# Altium PCB 1.PcbDoc (part 2 of 2)
Units mil, origin at the board's own origin, x right, y up, seen from the top; angles counter-clockwise.
Board outline 9055.12 x 5905.51 mil, 2 copper layers (Top Layer, Bottom Layer); 240 components, 221 nets, 945 pads, 455 vias.
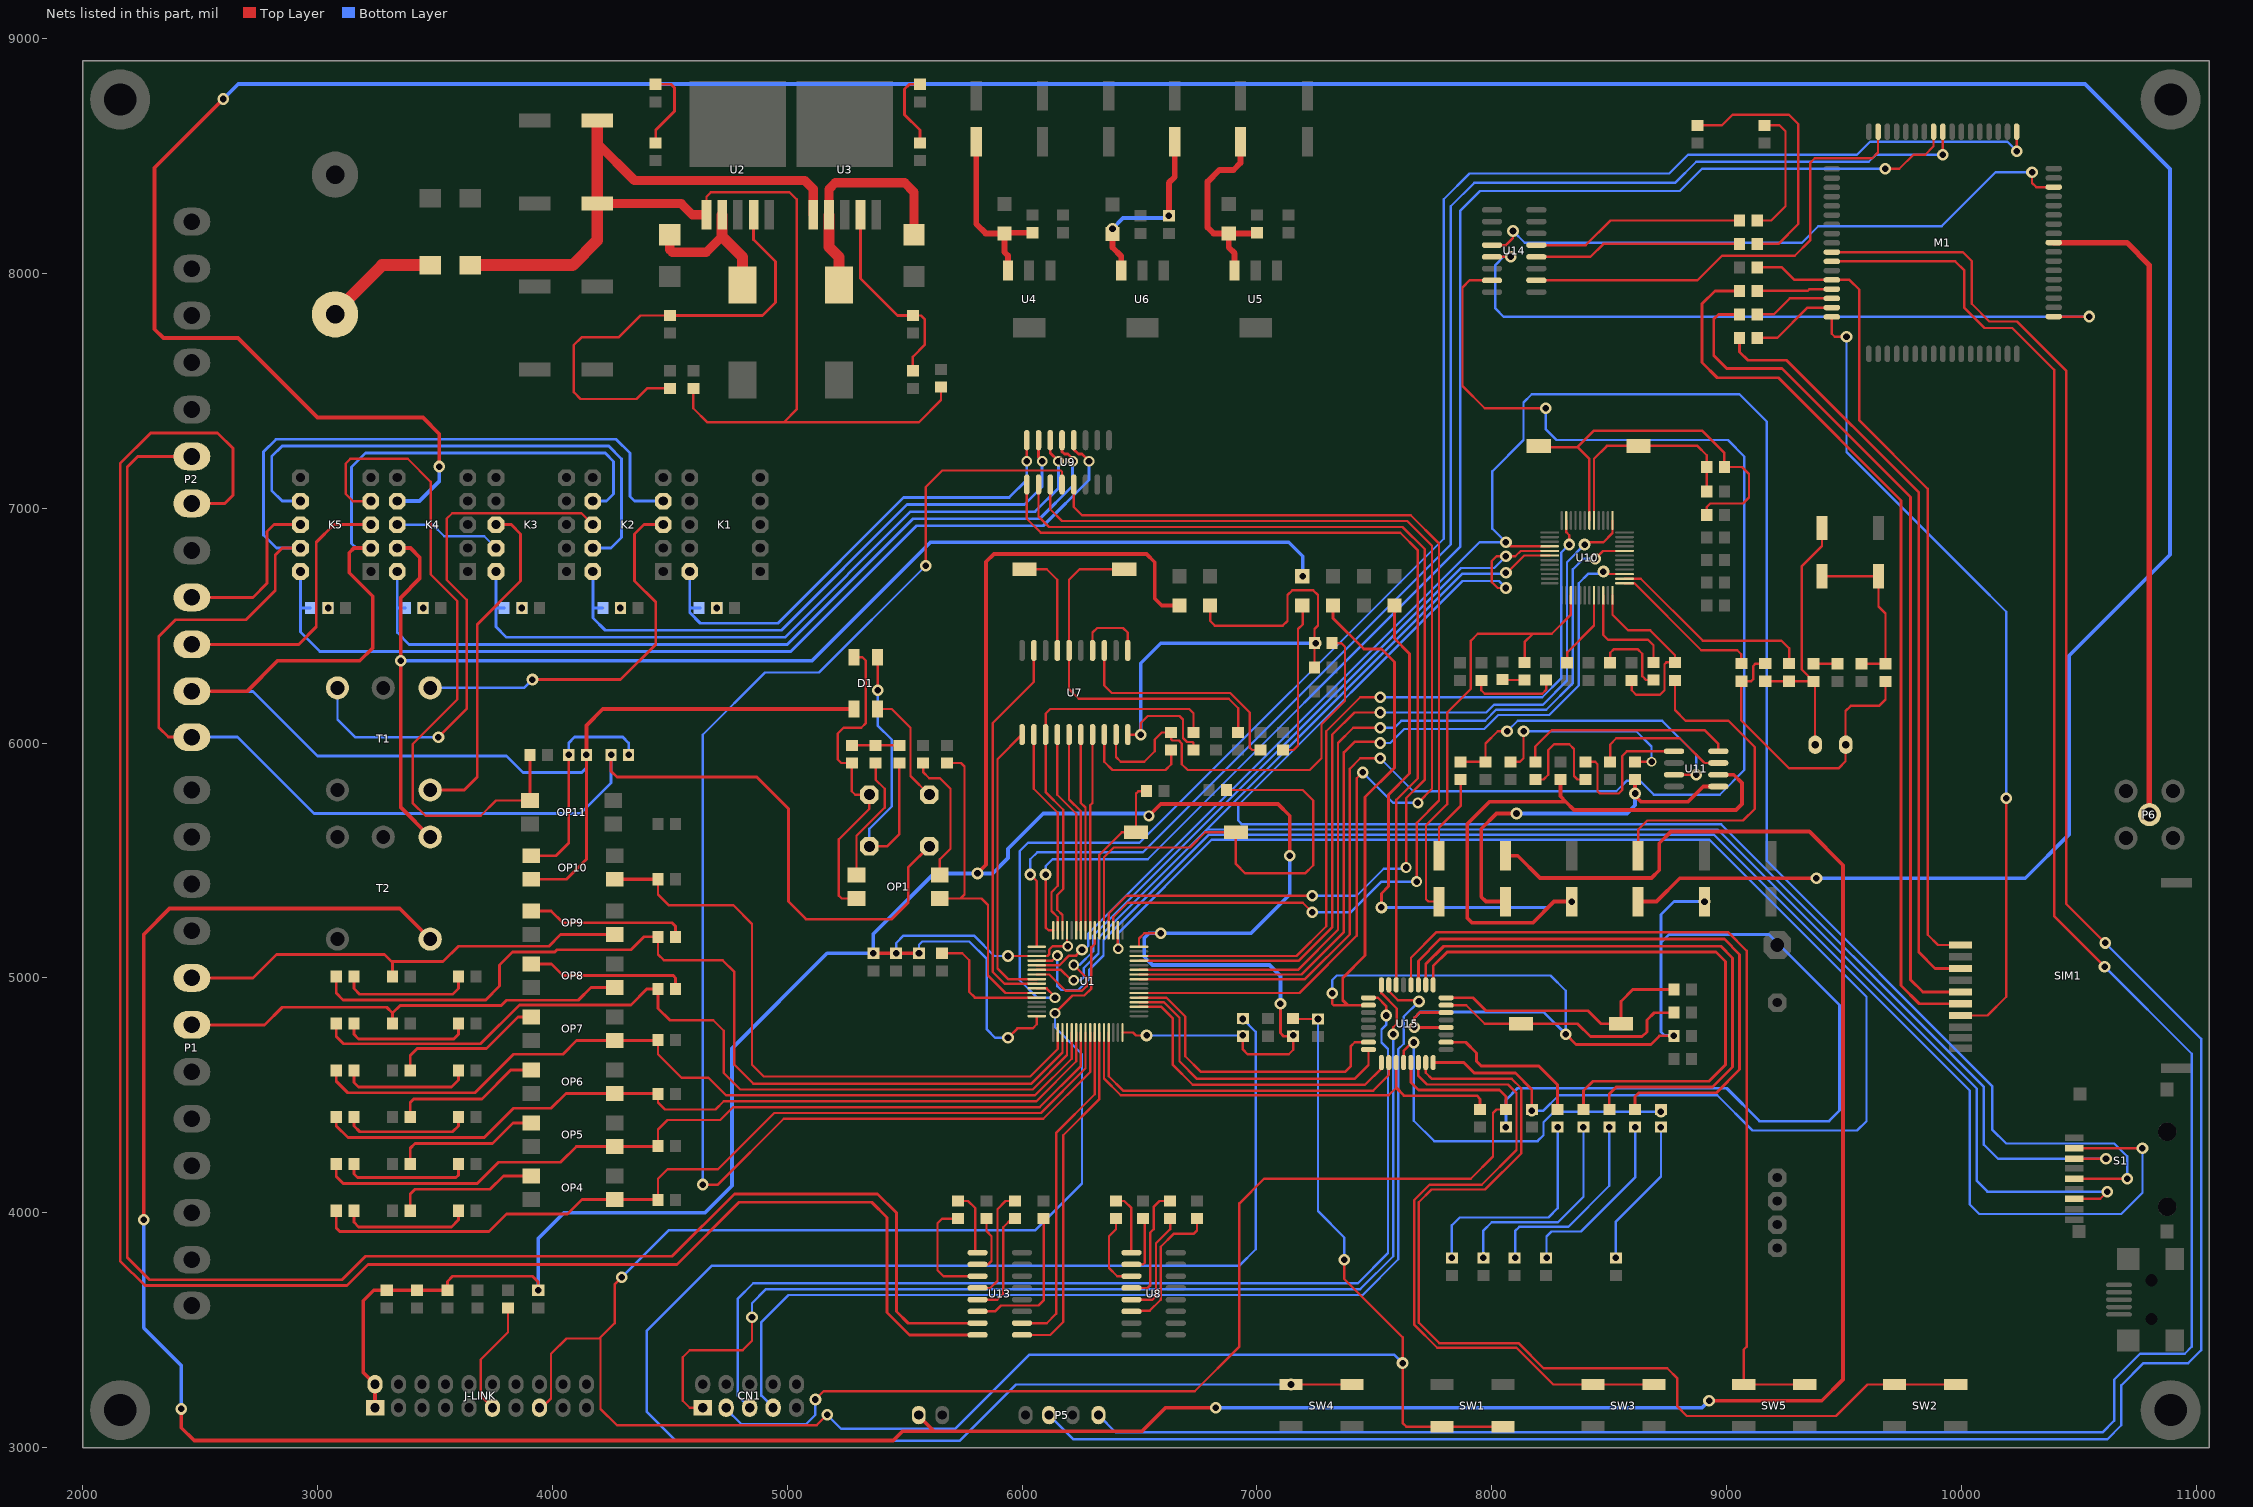
[diagram p2: the nets of this part, all layers, seen from the top]

## Via types
v1: diameter 50, hole 28, Top Layer to Bottom Layer, tented both sides, 197 vias
v2: diameter 47, hole 28, Top Layer to Bottom Layer, tented both sides, 140 vias
v3: diameter 42, hole 28, Top Layer to Bottom Layer, tented both sides, 78 vias
v4: diameter 45, hole 28, Top Layer to Bottom Layer, tented both sides, 27 vias
v5: diameter 46, hole 28, Top Layer to Bottom Layer, tented both sides, 7 vias
v6: diameter 35, hole 28, Top Layer to Bottom Layer, tented both sides, 4 vias
v7: diameter 44, hole 28, Top Layer to Bottom Layer, tented both sides, 1 vias
v8: diameter 40, hole 28, Top Layer to Bottom Layer, tented both sides, 1 vias

## Nets (pads, with @x,y where several pads share a name; then routed paths per layer and width w, separated by ;. In a path a pad name is that pad's centre, name@x,y a point inside that pad or via, vN(x,y) a via of type N, cw(c..) or ccw(c..) an arc to the next point about the centre after c; other vN are vias at no path point) (continued)
LEARN: SW3.1 U15.30 | length 2928.1
  Top Layer w10: U15.30@7687.24,4639.65 7687.24,4582.76 7723.81,4546.19 8068.81,4546.19 8105,4510 8105,4267 7957,4119 7735,4119 7669,4053 7669,3524 7768,3425 8105,3425 8261.1,3268.9 SW3.1@8430,3268.9 SW3.1@8690,3268.9
LED0: R22.1 U15.2 | length 675.3
  Top Layer w12: U15.2@7805.35,4726.26 7888.74,4726.26 7935,4680 7935,4645 7955,4625 8200,4625 8280.21,4544.79 R22.1@8280.21,4440
LED1: R21.1 U15.9 | length 2536.5
  Top Layer w12: U15.9@7750.24,4970.35 7750.24,5050.24 7810,5110 8955,5110 8995,5070 8995,4630 8925,4560 8430,4560 8390,4520 R21.1@8390,4440
LED2: R18.1 U15.10 | length 2549.6
  Top Layer w12: U15.10@7718.74,4970.35 7718.74,5058.74 7795,5135 8975,5135 9025,5085 9025,4620 8940,4535 8530,4535 8500,4505 R18.1@8500,4440
LED3: R20.1 U15.11 | length 2572.6
  Top Layer w12: U15.11@7687.24,4970.35 7687.24,5072.24 7780,5165 8990,5165 9055,5100 9055,4610 8956.19,4511.19 8626.19,4511.19 8610,4495 R20.1@8610,4440
LED-NETLIGHT: R65.2 U14.12 | length 888.3
  Top Layer w10: U14.12@8189.49,8070 8420,8070 8475,8125 R65.2@9055,8125
LED-STATUS: R64.2 U14.13 | length 909
  Top Layer w10: U14.13@8189.49,8120 8400,8120 8505,8225 R64.2@9055,8225
LED_STATUS: R74.1 U15.28 | length 1613.1
  Top Layer w10: U15.28@7624.25,4639.65 7624.25,4689.25 v1@7660,4725
  Top Layer w12: v1@7660,4725 v1(7667.81,4725)
  Bottom Layer w10: v1(7667.81,4725) 7667.81,4392.19 7755,4305 8195,4305 8220,4330 8220,4385 8265,4430 v1(8720,4430)
LINE_RECORD: C36.1 K4.9 | length 16342.3
  Top Layer w16: v1(2599,8742) 2306,8449 2306,7762 2344,7724 2662,7724 3000,7386 3449,7386 3518,7317 v1(3518,7177) ; C36.1@8622.8,5325 8701,5325 8800,5424 v1(9382,5424)
  Bottom Layer w16: v1(2599,8742) 2663,8806 10525,8806 10887,8444 10887,6802 10457,6372 10457,5610 10271,5424 v1(9382,5424) ; K4.9@3340,7030 3434,7030 3518,7114 v1(3518,7177)
LM-5V: C48.1 C50.1 L7.1 U11.6 | length 4594.3
  Top Layer w12: v1@7530,5322.38 7530,5360 7560,5390 7560,5780 7650,5870 7650,6380 7585,6445 L7.1@7585,6585
  Top Layer w16: C50.1@8292.01,5845 8292.01,5772.99 8315,5750 ; v1(8340.2,5325) 8265,5325 8175,5235 7915,5235 7895,5255 7895,5655 7990,5750 8315,5750 ; U11.6@8964.49,5865 9030,5865 9065,5830 9065,5740 9040,5715 8350,5715 8315,5750
  Bottom Layer w12: v1(7530,5300) 8240,5300 8265,5325 v1(8340.2,5325)
M8-5V: C59.1 C60.1 L8.1 R35.2 U15.4 U15.6 U15.18 | length 8727.8
  Top Layer w10: v1(7320,4935) 7320,4890 7326.26,4883.74 7386.26,4883.74
  Top Layer w12: L8.1@7323.57,6585 7323.57,6531.43 7455,6400 7530,6400 7585,6345 7585,5895 7460,5770 7460,5095 7365,5000 7365,4905 7386.26,4883.74 U15.18@7474.65,4883.74 ; U15.4@7805.35,4789.25 7670.75,4789.25 v1(7670,4790) 7670,4830 7692.24,4852.24 U15.6@7805.35,4852.24 ; v1(8315,4760) 8358,4717 8677,4717 8713.33,4753.33 v1(8775,4753.33)
  Bottom Layer w10: v1(7320,4935) 7320,4990 7340,5010 8250,5010 8315,4945 v1(8315,4760)
  Bottom Layer w12: v1(7670,4790) 7670,4830 7695,4855 8220,4855 v1(8315,4760) ; v2(8060,4365) 8060,4480 8110,4530 9000,4530 9140,4390 9435,4390 9480,4435 9480,4885 9180,5185 8755,5185 8720,5150 ; v1@8780,4755 8735,4755 8720,4770 8720,5150 ; v1@8904,5325 8775,5325 8720,5270 8720,5150
  other v1: 8905.4,5325
M8_MISO: CN1.1 U15.16 | length 4772.9
  Top Layer w10: CN1.1@4640,3170 4585,3170 4555,3200 4555,3385 4585,3415 4810,3415 4850,3455 v1(4850,3555) ; U15.16@7529.76,4970.35 7529.76,4935.24 7595,4870 7595,4805 7580,4790 v1(7580,4760)
  Bottom Layer w10: v1(4850,3555) 4850,3615 4910,3675 7440,3675 7580,3815 v1(7580,4760) v1@7580,4765
M8_MOSI: CN1.7 U15.15 | length 4516.3
  Top Layer w10: U15.15@7561.26,4970.35 7561.26,4943.67 7599.93,4905 7685,4905 v1(7690,4900)
  Bottom Layer w10: CN1.7@4940,3170 4940,3171.42 4890,3221.42 4890,3535 5005,3650 7450,3650 7601.81,3801.81 7601.81,4696.81 7625,4720 7625,4835 v1(7690,4900)
M8_Q0: U1.53 U15.23 | length 1308.7
  Top Layer w10: U1.53@6497.52,4916.1 6613.9,4916.1 6695,4835 6695,4666.81 6761.81,4600 7375,4600 7400,4625 7400,4710 7416.26,4726.26 U15.23@7474.65,4726.26
M8_Q1: U1.52 U15.24 | length 1310.5
  Top Layer w10: U1.52@6497.52,4896.42 6603.58,4896.42 6670,4830 6670,4645 6745,4570 7415,4570 7474.65,4629.65 U15.24@7474.65,4694.76
M8_Q2: U1.51 U15.25 | length 1339.5
  Top Layer w10: U1.51@6497.52,4876.73 6593.27,4876.73 6640.91,4829.09 6640.91,4630.91 6726.81,4545 7460,4545 7529.76,4614.76 U15.25@7529.76,4639.65
M8_Q3: U1.45 U15.26 | length 1485
  Top Layer w10: U1.45@6368.58,4767.48 6368.58,4581.42 6430,4520 7495,4520 7561.26,4586.26 U15.26@7561.26,4639.65
M8_RELAY_POWER: U9.1 U15.14 | length 3754.3
  Top Layer w10: U9.1@6020,7100.51 6020,6955 6080,6895 7610,6895 7685,6820 7685,5850 7592.76,5757.76 U15.14@7592.76,4970.35
M8_RESET: CN1.3 R35.1 U15.29 | length 4979.9
  Top Layer w10: v1(5120,3205) 5155,3240 6735,3240 6925,3430 6925,4040 7030,4145 7910,4145 8005,4240 8005,4425 8020,4440 R35.1@8060,4440
  Top Layer w12: U15.29@7655.75,4639.65 7655.75,4554.25 7687.62,4522.38 8032.62,4522.38 8060,4495 R35.1@8060,4440
  Bottom Layer w10: CN1.3@4740,3170 4740,3165 4805,3100 5080,3100 5120,3140 v1(5120,3205)
M8_SCK: CN1.5 U15.17 | length 4495.6
  Top Layer w10: U15.17@7474.65,4915.24 7514.76,4915.24 7550,4880 v1(7550,4840)
  Bottom Layer w10: CN1.5@4840,3170 4790,3220 4790,3635 4855,3700 7430,3700 7558.19,3828.19 7558.19,4696.81 7530,4725 7530,4780 7550,4800 v1(7550,4840)
M8_TO_STM32: R6.1 U1.44 U15.27 | length 2012.3
  Top Layer w10: U1.44@6348.9,4767.48 6348.9,4571.1 6420,4500 7560.51,4500 7592.76,4532.24
  Top Layer w12: U15.27@7592.76,4639.65 7592.76,4532.24 7626.43,4498.57 7936.43,4498.57 7950,4485 R6.1@7950,4440
MCU-3.3V: C22.1 C23.1 C24.1 J-LINK.1 J-LINK.2 L6.1 R19.2 R28.2 R31.2 R32.2 R33.2 R75.2 U1.13 U1.19 U1.32 U1.48 U1.64 | length 13440.5
  Top Layer w10: v1@5940,4755 v1(5940,4745) 5980,4785 6045,4785 6062.48,4802.48 U1.32@6062.48,4837.36 ; v1(5940,5093.27) U1.19@6062.48,5093.27 6108.27,5093.27 6115,5100 6115,5120 6130,5135 v4(6195,5135) 6191.42,5138.58 U1.13@6191.42,5202.52 ; U1.48@6427.95,4767.48 6472.52,4767.48 6485,4755 v1(6530,4755) v1@6517.52,4767.48 ; U1.64@6497.52,5132.64 6497.52,5167.52 6520,5190 v1(6590,5190) ; R19.2@6940,4751.61 6940,4695 6960,4675 7135,4675 7154.34,4694.34 R75.2@7154.34,4751.61
  Top Layer w12: R31.2@3553,3670 3553,3708 3575,3730 3915,3730 3940,3705 v1(3940,3670) ; v1(7100,4890) 7100,4765 7113.39,4751.61 R75.2@7154.34,4751.61
  Top Layer w16: J-LINK.1@3245,3170 J-LINK.2@3245,3270 3195,3320 3195,3625 3240,3670 R33.2@3295,3670 R32.2@3424,3670 R31.2@3553,3670 ; v2(5366.49,5105) v2(5463.82,5105) v2(5561.16,5105) ; v1(5810,5445) 5846.71,5481.71 5846.71,6771.71 5880,6805 6530,6805 6565,6770 6565,6615 6595,6585 L6.1@6670,6585 ; v2(6540,5690) 6590,5740 7090,5740 7140,5690 v1(7140,5520)
  Bottom Layer w10: v2(5463.82,5105) 5463.82,5148.82 5495,5180 5795,5180 5881.73,5093.27 v1(5940,5093.27) ; v2(5561.16,5105) 5561.16,5141.16 5575,5155 5775,5155 5850,5080 5850,4780 5885,4745 v1(5940,4745) ; v1(6530,4755) v2(6940,4755)
  Bottom Layer w16: v1(3940,3670) 3940,3890 4050,4000 4650,4000 4765,4115 4765,4700 5170,5105 v2(5366.49,5105) 5366.49,5186.49 5625,5445 v1(5810,5445) 5875,5445 5940,5510 5940,5550 6090,5700 6530,5700 v2(6540,5690) ; v1(7100,4890) 7100,5008.24 7053.24,5055 6555,5055 6520,5090 6520,5170 6540,5190 v1(6590,5190) 6975,5190 7140,5355 v1(7140,5520)
  other v2: 7155,4755
MCU-SIM-RESET: U1.57 U14.7 | length 6805.7
  Top Layer w10: U1.57@6497.52,4994.84 7204.84,4994.84 7395,5185 7395,5890 7440,5935 v1(7525,5935) v1@7525,5940.87 ; U14.7@8000.51,7970 7905,7970 7875,7940 7875,7520 7970,7425 v1(8230,7425)
  Bottom Layer w10: v1@7525,5940 v1(7525,5935) 7665,5795 8530,5795 8575,5840 8630,5840 8690,5780 8970,5780 9075,5885 9075,7220 9005,7290 8275,7290 8230,7335 v1(8230,7425)
MCU_IN1: D18.1 OP7.3 R43.1 U1.37 | length 3597
  Top Layer w10: R43.1@4450,4735 4450,4675 4550,4575 4665,4575 4740,4500 6055,4500 6211.1,4656.1 U1.37@6211.1,4767.48
  Top Layer w12: D18.1@3080,4606.43 3080,4560 3128.81,4511.19 3671.19,4511.19 3835,4675 4045,4675 4103.57,4733.57 OP7.3@4265,4733.57 R43.1@4448.57,4733.57
MCU_IN2: D20.1 OP6.3 R42.1 U1.38 | length 3541.3
  Top Layer w10: R42.1@4450,4506.43 4450,4470 4480,4440 4695,4440 4730,4475 6060.85,4475 6230.79,4644.94 U1.38@6230.79,4767.48
  Top Layer w12: D20.1@3080,4407.14 3080,4370 3130,4320 3710,4320 3835,4445 3995,4445 4057.86,4507.86 OP6.3@4265,4507.86 R42.1@4448.57,4507.86
MCU_IN3: D21.1 OP5.3 R41.1 U1.39 | length 3624.9
  Top Layer w10: R41.1@4450,4283.57 4450,4355 4490,4395 4715,4395 4770,4450 6075,4450 6250.47,4625.47 U1.39@6250.47,4767.48
  Top Layer w12: D21.1@3080,4207.86 3080,4155 3110,4125 3680,4125 3770,4215 4035,4215 4102.14,4282.14 OP5.3@4265,4282.14 R41.1@4448.57,4282.14
MCU_IN4: D22.1 OP4.3 R40.1 U1.40 | length 3762.1
  Top Layer w10: R40.1@4450,4055 4450,4145 4490,4185 4705,4185 4945,4425 6080,4425 6270.16,4615.16 U1.40@6270.16,4767.48
  Top Layer w12: D22.1@3080,4008.57 3080,3935 3095,3920 3730,3920 3805,3995 4065,3995 4126.43,4056.43 OP4.3@4265,4056.43 R40.1@4448.57,4056.43
MCU_OUT_Q1: D17.1 R57.2 U1.35 | length 4012.2
  Top Layer w10: R57.2@4450,5175 4450,5100 4475,5075 4725,5075 4775,5025 4775,4630 4855,4550 6040,4550 6171.73,4681.73 U1.35@6171.73,4767.48
  Top Layer w12: D17.1@3080,5005 3080,4935 3108.81,4906.19 3716.19,4906.19 3775,4965 3775,5055 3830,5110 4010,5110 4020,5120 4335,5120 4390,5175 R57.2@4450,5175
MCU_OUT_Q2: D19.1 R56.2 U1.36 | length 3762.9
  Top Layer w10: 4685,4820 4730,4775 4730,4595 4800,4525 6045,4525 6191.42,4671.42 U1.36@6191.42,4767.48
  Top Layer w12: D19.1@3080,4805.71 3080,4750 3110,4720 3695,4720 3860,4885 4335,4885 4402.14,4952.14 R56.2@4450,4952.14 4450,4870 4500,4820 4685,4820
MISO: S1.7 U1.22 U10.30 | length 7865.1
  Top Layer w10: U1.22@6062.48,5034.21 6165.79,5034.21 6210,4990 v4(6220,4990) ; v1@8065,6725 8138.11,6798.11 U10.30@8246.1,6798.11 ; S1.7@10480,4060 10590,4060 v1(10620,4090)
  Bottom Layer w10: v4(6220,4990) 6250,4990 6261.81,5001.81 6261.81,5040.97 6325,5104.15 6325,5170.85 7875.53,6721.38 8056.38,6721.38 v1(8060,6725) ; 6785,5630 6786.81,5631.81 8961.47,5631.81 10065,4528.28 10065,4135 10110,4090 v1(10620,4090)
MOSI: S1.2 U1.23 U10.29 | length 9574.4
  Top Layer w10: U1.23@6062.48,5014.53 6115.47,5014.53 6185,4945 6255,4945 6275,4965 6275,5000 v4(6220,5055) v4@6220,5060 ; v1(8060,6660) 8025,6660 8000,6685 8000,6775 8020,6795 v1(8060,6795) 8100,6795 8122.8,6817.8 U10.29@8246.1,6817.8 ; S1.2@10480,4230 v1(10615,4230)
  Bottom Layer w10: v4(6220,5055) 6245,5055 6303.19,5113.19 6303.19,5179.88 7868.31,6745 8010,6745 v1(8060,6795) ; v1(8060,6660) 8030,6690 7875,6690 6920,5735 6920,5670 6936.38,5653.62 8976.38,5653.62 10095,4535 10095,4290 10155,4230 v1(10615,4230)
MT-5V: C25.2 C26.1 L10.1 R24.1 U7.20 | length 2533.2
  Top Layer w10: U7.20@6450,6035.87 6504.13,6035.87 v1(6505,6035) 6505,6085 6535,6115 6670,6115 6685,6100 6685,6021.38 6701.81,6004.57 6725,6004.57 6730,5999.57 R24.1@6730,5970 ; L10.1@6800.71,6585 6800.71,6519.29 6820,6500 7110,6500 7130,6520 7130,6630 7150,6650 7240,6650 7260,6630 7260,6500 7245,6485 C26.1@7245,6425 C25.2@7245,6322.3
  Bottom Layer w16: v1(6505,6035) 6505,6340 6590,6425 v1(7250,6425)
MT_D0: U1.11 U7.14 | length 866.8
  Top Layer w10: U7.14@6150,6035.87 6150,5780 6230.79,5699.21 U1.11@6230.79,5202.52
MT_D1: U1.10 U7.15 | length 854.3
  Top Layer w10: U7.15@6200,6035.87 6200,5760 6250.47,5709.53 U1.10@6250.47,5202.52
MT_D2: U1.9 U7.16 | length 841.7
  Top Layer w10: U7.16@6250,6035.87 6250,5745 6270.16,5724.84 U1.9@6270.16,5202.52
MT_D3: U1.8 U7.17 | length 837.3
  Top Layer w10: U1.8@6290,5202.68 6290,5735 6300,5745 U7.17@6300,6035.87
MT_IRQ: R24.2 U1.14 U7.13 | length 1700.3
  Top Layer w10: U1.14@6171.73,5202.52 6171.73,5268.27 6150,5290 6150,5353.27 6175,5378.27 6175,5715.85 6100,5790.85 U7.13@6100,6035.87 6100,6125 6120,6145 6711.38,6145 6730,6126.38 R24.2@6730,6045
MT_RD: U1.15 U7.12 | length 909.9
  Top Layer w10: U7.12@6050,6035.87 6050,5805 6152.05,5702.95 6152.05,5392.05 6125,5365 6125,5285 6152.05,5257.95 ; U1.15@6152.05,5202.52 6152.05,5257.95 ; 6152.05,5246.12 6152.05,5257.95
MT_RS: U1.24 U7.11 | length 1225.5
  Top Layer w10: U7.11@6000,6035.87 5895,5930.87 5895,5040 5940.16,4994.84 U1.24@6062.48,4994.84
MT_RW: U1.25 U7.9 | length 1649.7
  Top Layer w10: U7.9@6050,6394.13 6050,6260 5875,6085 5875,5025 5924.84,4975.16 U1.25@6062.48,4975.16
MT_VREF: U7.1 U7.4 | length 318.3
  Top Layer w10: U7.4@6300,6394.13 6300,6470 6320,6490 6430,6490 6450,6470 U7.1@6450,6394.13
NetC1_1: C1.1 D1.2 | length 491.3
  Top Layer w10: D1.2@5385,6145 5445,6145 5525,6065 5525,5860 C1.1@5605,5780
NetC2_1: C2.1 D1.3 OP1.2 R2.2 | length 1401.2
  Top Layer w10: D1.3@5285,6365 5320,6365 5335,6350 5335,6085 5315,6065 5240,6065 5215,6040 5215,5930 5230,5915 R2.2@5275,5915 5275,5795 5290,5780 C2.1@5350,5780 5350,5720 5220,5590 5220,5350 5232.14,5337.86 OP1.2@5295,5337.86
NetC2_2: C2.2 D1.1 R1.1 | length 1320.9
  Top Layer w10: C2.2@5350,5560 5425,5560 5477.5,5612.5 R1.1@5477.5,5915 ; v1(5385,6225) D1.1@5385,6365
  Bottom Layer w10: C2.2@5350,5560 5350,5635 5445,5730 5445,6015 5385,6075 v1(5385,6225)
NetC3_1: C3.1 C4.1 C5.1 C6.1 D2.2 U2.1 U3.1 | length 5327.2
  Top Layer w10: C6.1@4600,7510 4600,7425 4660,7365 4985,7365 ; U2.1@4656.14,8248.7 4656.14,8326.14 4675,8345 5010,8345 5040,8315 5040,7420 4985,7365 ; C5.1@5655,7515 5655,7460 5560,7365 4985,7365
  Top Layer w39.37: 4191,8554 4350,8395 5075,8395 5111.14,8358.86 U3.1@5111.14,8248.7 ; C3.1@4248,8296.67 4548.33,8296.67 4596.3,8248.7 U2.1@4656.14,8248.7
  Top Layer w50: D2.2@3670,8035 4086,8035 4191,8140 C3.1@4191,8297 4191,8554 C4.1@4191,8650
NetC7_1: C7.1 C11.1 L2.2 U4.3 | length 770.2
  Top Layer w25: C11.1@5805,8560 5805,8210 5845,8170 L2.2@5925,8170 ; U4.3@5939.45,8012.05 5939.45,8075.55 5925,8090 L2.2@5925,8170 ; C7.1@6043.65,8172.4 5927.4,8172.4 L2.2@5925,8170
NetC8_1: C8.1 C10.1 L1.2 U5.3 | length 849.2
  Top Layer w25: U5.3@6904.45,8012.05 6905,8012.6 6905,8085 6880,8110 L1.2@6880,8170 ; C10.1@6930,8560 6930,8470 6900,8440 6840,8440 6790,8390 6790,8195 6815,8170 L1.2@6880,8170 ; C8.1@7001.15,8172.4 6998.75,8170 L1.2@6880,8170
NetC9_1: C9.1 C12.1 L3.2 U6.3 | length 759
  Top Layer w25: L3.2@6385,8167.6 6385,8110 6421.95,8073.05 U6.3@6421.95,8012.05 ; v4(6625,8245) 6625,8385 6650,8410 C12.1@6650,8560
  Bottom Layer w16: v1(6385,8190) 6430,8235 6615,8235 v4(6625,8245)
NetC26_2: C26.2 R23.1 U7.19 | length 1794
  Top Layer w10: U7.19@6400,6035.87 6400,5940 6420,5920 6520,5920 6565,5965 6565,6015 6595,6045 R23.1@6635,6045 6635,6015 6639.57,6010.43 6667.55,6010.43 6680,5997.99 6680,5910 6705,5885 7225,5885 7275,5935 7275,6080 7375,6180 7375,6410 7360,6425 C26.2@7320,6425
NetC27_1: C27.1 U1.5 X2.2 | length 2076.2
  Top Layer w10: U1.5@6348.9,5202.52 6348.9,5513.9 6390,5555 6715,5555 6780,5620 X2.2@6910.2,5620 6910.2,5484.8 6950,5445 7205,5445 7240,5480 7240,5755 7195,5800 C27.1@6870,5800
NetC28_1: C28.1 K4.7 T2.3 | length 5546.1
  Top Layer w16: K4.7@3340,6830 3396,6830 3435,6791 3435,6700 3355,6620 v1(3355,6350) 3355,5725 T2.3@3480,5600
  Bottom Layer w16: v1(3355,6350) 5105,6350 5610,6855 7135,6855 7195,6795 v1(7195,6710)
NetC28_2: C28.2 R27.2 | length 677.5
  Top Layer w10: R27.2@7110,5970 7155,5970 7175,5990 7175,6485 7195,6505 7195,6582.86 C28.2@7192.86,6585
NetC29_1: C29.1 U1.6 X2.1 | length 731.3
  Top Layer w10: U1.6@6329.21,5202.52 6329.21,5524.21 6425,5620 X2.1@6485,5620 6485,5785 6495,5795 C29.1@6530,5795
NetC31_1: C31.1 R36.2 U10.18 X4.2 | length 1702.8
  Top Layer w10: X4.2@8199.8,7265 8204.8,7260 8365,7260 ; U10.18@8415.39,6947.72 8415.39,7209.61 8365,7260 ; C31.1@8915,6970 8915,7005 8930,7020 9070,7020 9095,7045 9095,7145 9065,7175 R36.2@8990,7175 8990,7235 8895,7330 8435,7330 8365,7260
NetC32_1: C32.1 R36.1 U10.17 X4.1 | length 941.6
  Top Layer w10: U10.17@8435.08,6947.72 8435.08,7210.08 8490,7265 X4.1@8625,7265 8875,7265 8915,7225 R36.1@8915,7175 C32.1@8915,7070 C32.1@8915,7065
NetC33_1: C33.1 U8.2 | length 251
  Top Layer w10: U8.2@6465.24,3779.58 6514.58,3779.58 6522.24,3787.24 6522.24,3967.69 C33.1@6514.93,3975
NetC34_1: C34.1 U8.3 | length 332.3
  Top Layer w10: C34.1@6400,3975 6400,3930 6370,3900 6370,3765 6405.42,3729.58 U8.3@6465.24,3729.58
NetC34_2: C34.2 U8.1 | length 257.9
  Top Layer w10: C34.2@6400,4050 6435,4050 6465.24,4019.76 U8.1@6465.24,3839.58
NetC36_2: C36.2 R37.2 | length 1440.6
  Top Layer w10: C36.2@8622.8,5520 8622.8,5630.8 8662,5670 9070,5670 9120,5720 9120,5982 9007,6095 8825,6095 8780,6140 R37.2@8780,6268.23
NetC39_1: C39.1 R37.1 U10.48 | length 807.4
  Top Layer w10: U10.48@8513.82,6628.82 8513.82,6546.18 8580,6480 8674,6480 8780,6374 8780,6343.23 8743.23,6343.23 8735,6335 8735,6225 8715,6205 8615,6205 8595.33,6224.67 C39.1@8595.33,6266.61
NetC43_2: C43.2 U10.44 | length 334.5
  Top Layer w10: C43.2@8320.9,6341.61 8320.9,6385.9 8435.08,6500.08 U10.44@8435.08,6628.82
NetC44_1: C44.1 R50.1 | length 372.7
  Top Layer w10: C44.1@7955,6266.61 7955,6225 7970,6210 8215,6210 8231.14,6226.14 R50.1@8231.14,6268.23
NetC45_1: C45.1 R51.1 | length 343.7
  Top Layer w10: C45.1@8504.06,6341.61 8504.06,6384.06 8520,6400 8620,6400 8640,6380 8640,6285 8656.77,6268.23 R51.1@8688.52,6268.23
NetC46_1: C46.1 R52.1 | length 91.6
  Top Layer w10: C46.1@8048.09,6268.23 R52.1@8139.67,6268.23
NetC47_2: C47.2 R53.1 | length 363.2
  Top Layer w10: C47.2@7775,5520 7775,5640 7867.21,5732.21 R53.1@7867.21,5845
NetC49_1: C49.1 R58.1 | length 466.1
  Top Layer w10: R58.1@8185,5845 8220,5845 8240,5865 8240,5970 8265,5995 8330,5995 8350,5975 8350,5860 8365,5845 C49.1@8397.94,5845
NetC49_2: C49.2 U11.1 | length 660.4
  Top Layer w10: C49.2@8397.94,5920 8440,5920 8450,5910 8450,5795 8460,5785 8540,5785 8555,5800 8555,5945 8575,5965 U11.1@8775.51,5965
NetC51_2: C51.2 U11.7 | length 588.8
  Top Layer w10: C51.2@8503.87,5920 8503.87,5993.87 8530,6020 8800,6020 8905,5915 U11.7@8964.49,5915
NetC52_1: C52.1 R63.1 | length 884.1
  Top Layer w10: R63.1@8079.07,5920 8120,5920 8135,5935 v1(8135,6050) ; C52.1@8610,5920 v3(8680,5920)
  Bottom Layer w10: v1(8135,6050) 8615,6050 8680,5985 v3(8680,5920)
NetC52_2: C52.2 C53.1 U11.5 | length 1655.5
  Top Layer w10: v1@8610,5775 C52.2@8610,5845
  Top Layer w16: C53.1@8034,5325 7975,5325 7955,5345 7955,5635 8020,5700 v1(8105,5700) ; C52.2@8610,5845 v1(8610,5785) 8610,5775 8635,5750 8835,5750 8900,5815 U11.5@8964.49,5815
  Bottom Layer w16: v1(8105,5700) 8575,5700 8610,5735 v1(8610,5785)
NetC55_1: C55.1 U13.2 | length 265.2
  Top Layer w10: U13.2@5800.24,3779.58 5854.58,3779.58 5870,3795 5870,3900 5848.2,3921.8 C55.1@5848.2,3975
NetC56_1: C56.1 U13.3 | length 465.7
  Top Layer w10: C56.1@5726.6,3975 5660,3975 5640,3955 5640,3755 5665.42,3729.58 U13.3@5800.24,3729.58
NetC56_2: C56.2 U13.1 | length 276.3
  Top Layer w10: C56.2@5726.6,4050 5770,4050 5800.24,4019.76 U13.1@5800.24,3829.58
NetC57_2: C57.2 U13.6 | length 648.8
  Top Layer w10: U13.6@5810.51,3580 5885,3580 5910,3605 6070,3605 6091.6,3626.6 C57.2@6091.6,3975
NetC58_1: C58.1 U13.4 | length 501.9
  Top Layer w10: U13.4@5800.24,3679.58 5864.58,3679.58 5895,3710 5895,4015 5930,4050 C58.1@5970,4050
NetC58_2: C58.2 U13.5 | length 478.6
  Top Layer w10: U13.5@5800.24,3629.58 5894.58,3629.58 5920,3655 5920,3938 5957,3975 C58.2@5970,3975
NetC61_1: C61.1 U15.7 X5.1 | length 1096.4
  Top Layer w10: U15.7@7805.35,4883.74 7891.26,4883.74 7970,4805 X5.1@8115,4805
  Top Layer w12: X5.1@8115,4805 X5.1@8125,4805 8365,4805 8420,4750 8640,4750 8660,4770 8660,4820 8691.67,4851.67 C61.1@8775,4851.67
NetC62_1: C62.1 U15.8 X5.2 | length 1131.1
  Top Layer w12: U15.8@7805.35,4915.24 7919.76,4915.24 7975,4860 8410,4860 8465,4805 X5.2@8550.2,4805 8550.2,4900.2 8600,4950 C62.1@8775,4950
NetC65_2: C65.2 U8.6 | length 604.6
  Top Layer w10: U8.6@6465.24,3579.58 6468.66,3583 6543,3583 6590,3630 6590,3855 6645,3910 6730,3910 6745,3925 C65.2@6745,3975
NetC66_1: C66.1 U8.4 | length 505.7
  Top Layer w10: U8.4@6465.24,3679.58 6534.58,3679.58 6545,3690 6545,3915 6560,3930 6560,4025 6585,4050 C66.1@6630.07,4050
NetC66_2: C66.2 U8.5 | length 466
  Top Layer w10: U8.5@6465.24,3629.58 6554.58,3629.58 6570,3645 6570,3870 6630.07,3930.07 C66.2@6630.07,3975
NetC67_1: C67.1 C71.1 R80.1 R81.2 | length 726.7
  Top Layer w10: C67.1@9406,6710 C71.1@9646,6710 9646,6581 9676,6551 R80.1@9676,6337.61 R81.2@9574.12,6337.61
NetC67_2: C67.2 C68.2 C69.1 MIC.1 R73.1 | length 1183.5
  Top Layer w10: C68.2@9164.08,6263 C69.1@9265.76,6263 R73.1@9369.97,6263 ; MIC.1@9376,5997 9376,6256.97 R73.1@9370.36,6262.61 R73.1@9369.97,6263 ; C67.2@9406,6915 9406,6839 9319,6752 9319,6313.97 R73.1@9369.97,6263
NetC68_1: C68.1 C70.1 MIC.2 R80.2 | length 1355.8
  Top Layer w10: C68.1@9164.08,6338 9123,6338 9113,6328 9113,6272 9104,6263 C70.1@9062,6263 9062,6096 9266,5892 9476,5892 9506,5922 9506,5997 9506,6136 9528,6158 9649,6158 9676,6185 R80.2@9676,6262.61
NetC69_2: C69.2 U10.2 | length 888.8
  Top Layer w10: U10.2@8565,6699.69 8634.31,6699.69 8898.5,6435.5 9233.5,6435.5 9265.76,6403.24 C69.2@9265.76,6338
NetC70_2: C70.2 U10.1 | length 662.1
  Top Layer w10: U10.1@8565,6680 8607,6680 8892,6395 9045,6395 9062,6378 C70.2@9062,6338
NetD2_1: D2.1 F1.2 | length 497.8
  Top Layer w50: F1.2@3075,7825 3075,7835 3275,8035 D2.1@3480,8035
NetD4_2: D4.2 R25.1
  other v4: 4700,6575
NetD5_2: D5.2 L4.1 U2.2 | length 653.7
  Top Layer w39.37: D5.2@4500,8163.58 4500,8100 4510,8090 4655,8090 4723.07,8158.07
  Top Layer w47.24: U2.2@4723.07,8248.7 4723.07,8158.07 4723.07,8156.93 4810,8070 L4.1@4810,7950
NetD6_2: D6.2 L5.1 U3.2 | length 996.5
  Top Layer w39.37: U3.2@5178.07,8248.7 5178.07,8358.07 5205,8385 5500,8385 5540,8345 D6.2@5540,8163.58
  Top Layer w47.24: U3.2@5178.07,8248.7 5178.07,8111.93 5220,8070 L5.1@5220,7950
NetD7_2: D7.2 R38.1
  other v4: 4290,6575
NetD8_2: D8.2 R12.1 | length 354.4
  Top Layer w12: R12.1@4440,8555 4440,8610 4520,8690 4520,8790 4505,8805 D8.2@4440,8805
NetD9_2: D9.2 R13.1 | length 330.2
  Top Layer w12: R13.1@5565,8555 5565,8610 5500,8675 5500,8785 5520,8805 D9.2@5565,8805
NetD10_1: D10.1 R22.2 | length 960.8
  Bottom Layer w10: v2@7830,3812 7830,3947 7863,3980 8241,3980 8280,4019 v3(8280,4365)
  other v2: 7830,3808
NetD11_1: D11.1 R21.2 | length 897.6
  Bottom Layer w10: v2(7964,3809) 7964,3924 8000,3960 8282,3960 8390,4068 v3(8390,4365)
NetD12_1: D12.1 R18.2 | length 844.9
  Bottom Layer w10: v2(8099,3808) 8099,3922 8117,3940 8325,3940 8500,4115 v3(8500,4365)
NetD13_1: D13.1 R20.2 | length 787
  Bottom Layer w10: v2(8233,3808) 8233,3899 8254,3920 8380,3920 8610,4150 v3(8610,4365)
NetD14_1: D14.1 R74.2 | length 638.9
  Bottom Layer w10: v2@8527,3806 8527,3961 8720,4154 v3(8720,4365)
  other v2: 8528,3808
NetD15_2: D15.2 R39.1
  other v4: 3870,6575
NetD16_2: D16.2 R44.1
  other v4: 3450,6575
NetD17_2: D17.2 R66.1 | length 565.7
  Top Layer w12: D17.2@3155,5005 3155,4955 3180,4930 3575,4930 3600,4955 R66.1@3600,5005
NetD18_2: D18.2 R67.1 | length 558.6
  Top Layer w12: D18.2@3155,4606.43 3155,4555 3175,4535 3570,4535 3600,4565 R67.1@3600,4606.43
NetD19_2: D19.2 R68.1 | length 553
  Top Layer w12: D19.2@3155,4805.71 3155,4760 3175,4740 3580,4740 3600,4760 R68.1@3600,4805.71
NetD20_2: D20.2 R69.1 | length 540
  Top Layer w12: D20.2@3155,4407.14 3155,4370 3180,4345 3575,4345 3600,4370 R69.1@3600,4407.14
NetD21_2: D21.2 R70.1 | length 546.1
  Top Layer w12: D21.2@3155,4207.86 3155,4165 3170,4150 3590,4150 3600,4160 R70.1@3600,4207.86
NetD22_2: D22.2 R71.1 | length 552.9
  Top Layer w12: D22.2@3155,4008.57 3155,3960 3175,3940 3570,3940 3600,3970 R71.1@3600,4008.57
NetD23_2: D23.2 R45.1
  other v4: 3045,6575
NetK2_3: K2.3 T1.3 | length 1683
  Top Layer w12: v1(3915,6270) 4290,6270 4440,6420 4440,6600 4350,6690 4350,6890 4390,6930 K2.3@4472.5,6930
  Bottom Layer w12: T1.3@3480,6235 3880,6235 v1(3915,6270)
NetK2_7: K2.7 K5.9 | length 2293.7
  Bottom Layer w12: K5.9@2927.5,7030 2850,7030 2805,7075 2805,7220 2850,7265 4240,7265 4295,7210 4295,6875 4250,6830 K2.7@4172.5,6830
NetK2_8: K2.8 T1.4 | length 2263.2
  Top Layer w10: v1(3515,6025) 3635,6145 3635,6610 3550,6695 3550,6955 3573.43,6978.43 4124.07,6978.43 K2.8@4172.5,6930
  Bottom Layer w10: T1.4@3085,6235 3085,6100 3160,6025 v1(3515,6025)
NetK3_7: K3.7 K4.8 | length 461.4
  Bottom Layer w10: K4.8@3340,6930 3490,6930 3540,6880 3710,6880 K3.7@3760,6830
NetK3_8: K3.8 T1.1 | length 1456
  Top Layer w12: T1.1@3480,5800 3625,5800 3680,5855 3680,6505 3865,6690 3865,6890 3825,6930 K3.8@3760,6930
NetK5_2: K5.2 OP11.1 R78.1 | length 2898
  Top Layer w10: K5.2@3227.5,7030 3150,7030 3120,7060 3120,7190 3140,7210 3384,7210 3482,7112 3482,6718 3595,6605 3595,6185 3405,5995 3405,5745 3460,5690 3695,5690 3760,5755 OP11.1@3905,5755
  Top Layer w12: OP11.1@3905,5755 R78.1@3905,5950
NetNETLIGHT_2: NETLIGHT.2 R65.1 | length 1100.4
  Top Layer w10: NETLIGHT.2@8875,8630 8980,8630 9025,8675 9265,8675 9305,8635 9305,8210 9220,8125 R65.1@9130,8125
NetOP1_1: OP1.1 R3.2 | length 542.9
  Top Layer w10: OP1.1@5295,5437.86 5295,5605 5415,5725 5415,5805 5376.25,5843.75 R3.2@5376.25,5915
NetOP1_4: OP1.4 R4.1 | length 570.3
  Top Layer w10: R4.1@5578.75,5915 5578.75,5876.25 5605,5850 5650,5850 5695,5805 5695,5550 5650,5505 OP1.4@5650,5437.86
NetOP4_1: OP4.1 R46.2 | length 618.1
  Top Layer w12: R46.2@3395,4008.57 3395,4080 3415,4100 3735,4100 3791.43,4156.43 OP4.1@3910,4156.43
NetOP5_1: OP5.1 R47.2 | length 626.5
  Top Layer w12: R47.2@3395,4207.86 3395,4275 3415,4295 3745,4295 3832.14,4382.14 OP5.1@3910,4382.14
NetOP6_1: OP6.1 R48.2 | length 635
  Top Layer w12: R48.2@3395,4407.14 3395,4470 3410,4485 3700,4485 3822.86,4607.86 OP6.1@3910,4607.86
NetOP7_1: OP7.1 R49.2 | length 646.3
  Top Layer w12: R49.2@3395,4606.43 3395,4670 3425,4700 3720,4700 3853.57,4833.57 OP7.1@3910,4833.57
NetOP8_1: OP8.1 R56.1 | length 687.4
  Top Layer w12: OP8.1@3910,5059.29 3995.71,5059.29 4045,5010 4515,5010 4525,5000 R56.1@4525,4952.14
NetOP9_1: OP9.1 R57.1 | length 686.9
  Top Layer w12: OP9.1@3910,5285 3995,5285 4045,5235 4510,5235 4525,5220 R57.1@4525,5175
NetOP10_1: OP10.1 R26.1 R76.1 | length 933.5
  Top Layer w12: OP10.1@3910,5520 4015,5520 4070,5575 v4(4070,5950)
  Bottom Layer w12: v4(4070,5950) 4070,6000 4095,6025 4300,6025 4325,6000 v5(4325,5950)
NetR1_2: R1.2 R2.1 R3.1 | length 202.5
  Top Layer w10: R2.1@5275,5990 R3.1@5376.25,5990 R1.2@5477.5,5990
NetR8_2: R8.2 R9.1 U2.4 | length 1985.9
  Top Layer w10: R9.1@4500,7510 4403,7510 4358,7465 4120,7465 4091,7494 4091,7694 4124,7727 4282,7727 4375,7820 R8.2@4500,7820
  Top Layer w12: R8.2@4500,7820 4895,7820 4950,7875 4950,8050 4856.93,8143.07 U2.4@4856.93,8248.7
NetR10_2: R10.2 R11.1 U3.4 | length 856.1
  Top Layer w10: R11.1@5535,7585 5535,7645 5585,7695 5585,7805 5570,7820 R10.2@5535,7820
  Top Layer w12: U3.4@5311.93,8248.7 5311.93,7978.07 5470,7820 R10.2@5535,7820
NetR15_2: R15.2 U7.6 X1.1 | length 1575.8
  Top Layer w10: X1.1@6435,6740 6245,6740 6200,6695 U7.6@6200,6394.13 6200,6230 6241.38,6188.62 6879.69,6188.62 6920,6148.31 R15.2@6920,6045
NetR16_1: R16.1 U7.3 | length 1015.4
  Top Layer w10: U7.3@6350,6394.13 6350,6245 6381.81,6213.19 6885.97,6213.19 6970,6129.15 6970,5980 6980,5970 R16.1@7015,5970
NetR17_2: R17.2 U1.28 | length 559.8
  Top Layer w10: R17.2@5660,5105 5745,5105 5775,5075 5775,4940 5798.9,4916.1 U1.28@6062.48,4916.1
NetR19_1: R19.1 SW4.2 | length 7237.3
  Top Layer w10: v1(7145,3268.9) SW4.2@7405,3268.9
  Bottom Layer w10: v2(6940,4825) 6995,4770 6995,3845 6925,3775 4680,3775 4401.38,3496.38 4401.38,3153.62 4525,3030 5735,3030 5973.9,3268.9 v1(7145,3268.9)
NetR23_2: R23.2 U7.18 | length 485.7
  Top Layer w10: U7.18@6350,6035.87 6350,5920 6385,5885 6610,5885 6635,5910 R23.2@6635,5970
NetR51_2: R51.2 U10.46 | length 473.8
  Top Layer w10: U10.46@8474.45,6628.82 8474.45,6460.55 8495,6440 8665,6440 8688.52,6416.48 R51.2@8688.52,6343.23
NetR53_2: R53.2 R54.1 U11.3 | length 1360.6
  Top Layer w10: R53.2@7867.21,5920 R54.1@7973.14,5920 7973.14,5998.14 8025,6050 v1(8065,6050) ; U11.3@8775.51,5865 v1(8870,5865)
  Bottom Layer w10: v1(8065,6050) 8110,6095 8725,6095 8870,5950 v1(8870,5865)
NetR55_1: R55.1 SIM1.6 | length 3873.2
  Top Layer w12: R55.1@9055,7925 8950,7925 8895,7870 8895,7620 8960,7555 9220,7555 9742,7033 9742,4968 9820,4890 SIM1.6@9995,4890
NetR58_2: R58.2 U11.8 | length 928.6
  Top Layer w10: R58.2@8185,5920 8185,5985 8255,6055 8905,6055 8964.49,5995.51 U11.8@8964.49,5965
NetR59_2: R59.2 SIM1.5 | length 3649.6
  Top Layer w12: R59.2@9055,7825 8965,7825 8945,7805 8945,7650 9000,7595 9235,7595 9783,7047 9783,4992 9835,4940 SIM1.5@9995,4940
NetR60_2: R60.2 SIM1.3 | length 3234.3
  Top Layer w12: R60.2@9055,7725 9055,7665 9090,7630 9255,7630 9818,7067 9818,5109 9887,5040 SIM1.3@9995,5040
NetR64_1: R64.1 STATUS.2 | length 565.2
  Top Layer w10: R64.1@9130,8225 9190,8225 9250,8285 9250,8605 9225,8630 STATUS.2@9160,8630
NetR72_1: R72.1 R73.2 | length 101.9
  Top Layer w10: R73.2@9370.36,6337.61 R72.1@9472.24,6337.61
NetU7_7: U7.7 X1.2 | length 459.7
  Top Layer w10: X1.2@6009.8,6740 6105,6740 6150,6695 U7.7@6150,6394.13
NRST: C30.1 J-LINK.15 R75.1 SW1.1 U1.7 | length 10567.8
  Top Layer w10: J-LINK.15@3945,3170 3955,3170 3994.48,3209.48 3994.48,3399.48 4060,3465 4200,3465 4265,3530 ; v1(4295,3725) 4265,3695 4265,3530 ; v1(5170,3140) 5125,3095 4275,3095 4205,3165 4205,3470 4265,3530 ; v4(6140,4850) 6215,4925 6265,4925 6295,4955 6295,5130 6309.53,5144.53 U1.7@6309.53,5202.52 ; R75.1@7155.96,4825 v2(7260,4825) ; v1(7372,3800) 7372,3718 7620,3470 v1(7620,3360) 7620,3105 7636.1,3088.9 SW1.1@7787.5,3088.9 SW1.1@8047.5,3088.9
  Bottom Layer w10: v1(4295,3725) 4495,3925 6055,3925 6255,4125 6255,4675 6140,4790 v4(6140,4850) ; v1(5170,3140) 5230,3080 5715,3080 6030,3395 7585,3395 v1(7620,3360) ; v2(7260,4825) 7260,4007 7372,3895 v1(7372,3800)
ON_OFF: SW2.1 U15.31 | length 4365.1
  Top Layer w10: 7718.74,4596.26 7745,4570 8085,4570 8125,4530 8125,4253 7971,4099 7743.28,4099 7689,4044.72 7689,3532.28 7776.28,3445 8113.28,3445 8220.28,3338 8747,3338 8790,3295 8790,3175 8830,3135 9465,3135 9598.9,3268.9 SW2.1@9715,3268.9 SW2.1@9975,3268.9
  Top Layer w12: 7718.74,4596.26 U15.31@7718.74,4639.65
OUT_Q1: OP9.3 P1.5 R62.2 | length 1968.6
  Top Layer w12: P1.5@2465,5000 2725,5000 2825,5100 3285,5100 3315,5070 ; R62.2@3320,5005 3320,5065 3315,5070 ; OP9.3@4265,5185 4035,5185 3985,5135 3600,5135 3535,5070 3315,5070
OUT_Q2: OP8.3 P1.6 R61.2 | length 1931
  Top Layer w12: P1.6@2465,4800 2775,4800 2850,4875 3295,4875 3320,4850 ; R61.2@3320,4805.71 3320,4850 ; OP8.3@4265,4959.29 4164.29,4959.29 4110,4905 3805,4905 3782.38,4882.38 3352.38,4882.38 3320,4850
PHONE_IRQ: OP10.3 R77.1 U1.34 | length 2743.5
  Top Layer w10: R77.1@4450,5420 4450,5355 4495,5310 4770,5310 4850,5230 4850,4630 4900,4580 6035,4580 6152.05,4697.05 U1.34@6152.05,4767.48
  Top Layer w16: OP10.3@4265,5420 R77.1@4450,5420
PHONE_RING: K5.8 P2.9 | length 719.8
  Top Layer w12: P2.9@2465,6620 2725,6620 2785,6680 2785,6900 2815,6930 K5.8@2927.5,6930
PHONE_TIP: K5.3 P2.10 | length 1184.6
  Top Layer w12: P2.10@2465,6420 2920,6420 2995,6495 2995,6855 3070,6930 K5.3@3227.5,6930
PLC_RX_RS232: P2.6 U13.7 | length 7933.4
  Top Layer w12: P2.6@2465,7220 2235,7220 2190,7175 2190,3810 2285,3715 3105,3715 3205,3815 4510,3815 4775,4080 5385,4080 5465,4000 5465,3580 5515.42,3529.58 U13.7@5800.24,3529.58
PLC_RX_TTL: U1.43 U13.9 | length 1474.1
  Top Layer w10: U13.9@6020.24,3479.58 6119.58,3479.58 6175,3535 6175,4330 6329.21,4484.21 U1.43@6329.21,4767.48
PLC_TX_RS232: P2.7 U13.8 | length 8647.5
  Top Layer w12: P2.7@2465,7020 2605,7020 2640,7055 2640,7255 2575,7320 2290,7320 2160,7190 2160,3795 2265,3690 3125,3690 3215,3780 4530,3780 4795,4045 5360,4045 5425,3980 5425,3575 5520.42,3479.58 U13.8@5800.24,3479.58
PLC_TX_TTL: U1.42 U13.10 | length 1407.1
  Top Layer w10: U13.10@6020.24,3529.58 6104.58,3529.58 6145,3570 6145,4340 6309.53,4504.53 U1.42@6309.53,4767.48
RELAY_BUSY: K2.1 R38.2 U9.15 | length 2632.6
  Top Layer w12: U9.15@6070,7289.49 6070,7215 v4(6085,7200)
  Bottom Layer w12: K2.1@4172.5,6730 4172.5,6575 ; R38.2@4215,6575 4172.5,6575 ; v4(6085,7200) 6085,7090 6010,7015 5510,7015 4975,6480 4225,6480 4172.5,6532.5 4172.5,6575
RELAY_CALL: K3.1 R39.2 U9.14 | length 3165.7
  Top Layer w12: U9.14@6120,7289.49 6120,7235 v4(6155,7200)
  Bottom Layer w12: K3.1@3760,6730 3760,6575 ; R39.2@3795,6575 3760,6575 ; v4(6155,7200) 6155,7085 6055,6985 5525,6985 4990,6450 3805,6450 3760,6495 3760,6575
RELAY_INTERCOM: K5.1 R45.2 U9.12 | length 4194.2
  Top Layer w12: U9.12@6220,7289.49 6220,7250.15 6240.08,7230.08 6254.92,7230.08 v4(6285,7200)
  Bottom Layer w12: K5.1@2927.5,6730 2927.5,6472.5 3010,6390 5015,6390 5550,6925 6090,6925 6285,7120 v4(6285,7200) ; 2932.5,6575 R45.2@2970,6575
RELAY_POWER: K1.1 R25.2 U9.16 | length 2097.9
  Top Layer w12: v4(6020,7200) U9.16@6020,7289.49
  Bottom Layer w12: K1.1@4585,6730 4585,6580 ; R25.2@4630,6575 R25.2@4625,6575 4590,6575 4585,6580 ; v4(6020,7200) 6020,7120 5945,7045 5495,7045 4960,6510 4630,6510 4585,6555 4585,6580
RELAY_RECORD: K4.1 R44.2 U9.13 | length 3690.1
  Top Layer w12: U9.13@6170,7289.49 6170,7240 6180,7230 6195,7230 6210,7215 6210,7200 v4(6215,7200)
  Bottom Layer w12: K4.1@3340,6730 3340,6470 3390,6420 5000,6420 5535,6955 6075,6955 6215,7095 v4(6215,7200) ; 3345,6575 R44.2@3375,6575
RIGHT: C47.1 R52.2 U10.39 | length 1929.3
  Top Layer w10: C47.1@7775,5325 7730,5325 7720,5335 7720,5650 7810,5740 7810,6130 7910,6230 7910,6435 7940,6465 8175,6465 ; R52.2@8139.67,6343.23 8139.67,6429.67 8175,6465 ; U10.39@8336.65,6628.82 8336.65,6546.65 8255,6465 8175,6465
RING: D1.4 K2.9 K5.4 OP10.2 P2.11 R76.2 | length 7100.1
  Top Layer w12: OP10.2@3910,5420 4060,5420 4145,5505 v5(4145,5950)
  Top Layer w16: P2.11@2465,6220 2700,6220 2830,6350 3180,6350 3235,6405 3235,6625 3135,6725 3135,6810 3155,6830 K5.4@3227.5,6830 ; v5(4145,5950) 4145,6075 4215,6145 D1.4@5285,6145
  Bottom Layer w12: P2.11@2465,6220 2725,6220 3000,5945 3805,5945 3875,5875 4125,5875 4145,5895 v5(4145,5950) ; K5.4@3227.5,6830 3165,6830 3145,6850 3145,7175 3205,7235 4225,7235 4261,7199 4261,7061 4230,7030 K2.9@4172.5,7030
RING_DETECT: OP1.3 R5.2 U1.27 | length 1405.2
  Top Layer w10: OP1.3@5650,5337.86 5737.86,5337.86 ; R5.2@5680,5915 5740,5915 5755,5900 5755,5355 5737.86,5337.86 ; U1.27@6062.48,4935.79 5929.21,4935.79 5855,5010 5855,5310 5827.14,5337.86 5737.86,5337.86
RTCK: J-LINK.11 R29.1 | length 493.8
  Top Layer w10: J-LINK.11@3745,3170 3695,3220 3695,3375 3811,3491 R29.1@3811,3595
SCK: S1.5 U1.21 U10.28 | length 9083.2
  Top Layer w10: U1.21@6062.48,5053.9 6158.9,5053.9 6200,5095 6230,5095 v1(6255,5120) ; v1(8060,6855) 8077.52,6837.48 U10.28@8246.1,6837.48 ; S1.5@10480,4145 v1(10705,4145)
  Bottom Layer w10: v1@6265,5120 6281.38,5136.38 6281.38,5188.91 7947.46,6855 v1(8060,6855) 8002.5,6912.5 8002.5,7157.5 8135,7290 8135,7450 8170,7485 9054,7485 9171,7368 9171,5499 10130,4540 10130,4355 10190,4295 10650,4295 10705,4240 v1(10705,4145)
SIM-ANTEN: M1.60 P6.1 | length 2786.6
  Top Layer w23.5: M1.60@10392.44,8130.61 10703.39,8130.61 10800,8034 P6.1@10800,5695
SIM-CLK: M1.32 R59.1 | length 345.8
  Top Layer w10: R59.1@9130,7825 9200,7825 9268.17,7893.17 M1.32@9447.56,7893.17
SIM-DATA: M1.31 R55.2 | length 320.8
  Top Layer w10: R55.2@9130,7925 9345,7925 9352.74,7932.74 M1.31@9447.56,7932.74
SIM-DBG-RXD: M1.28 P5.4 | length 10572.4
  Top Layer w10: M1.28@9447.56,8050.65 9973.35,8050.65 10012,8012 10012,7852 10097,7767 10216,7767 10394,7589 10394,5263 v1(10609,5048)
  Bottom Layer w10: P5.4@6325,3138.9 6398.9,3065 10600,3065 10650,3115 10650,3290 10760,3400 10950,3400 10980,3430 10980,4677 v1(10609,5048)
SIM-DBG-TXD: M1.27 P5.2 | length 10927
  Top Layer w10: M1.27@9447.56,8090.02 10005,8090 10043,8052 10043,7870 10118,7795 10236,7795 10445,7586 10445,5316 v1(10612,5149)
  Bottom Layer w10: P5.2@6115,3138.9 6218.9,3035 10620,3035 10680,3095 10680,3265 10775,3360 10965,3360 11020,3415 11020,4741 v1(10612,5149)
SIM-NETLIGHT: M1.52 U14.5 | length 3037.1
  Top Layer w10: U14.5@8000.51,8070 v1(8080,8070) ; M1.52@10392.44,7815.65 v1(10543.35,7815.65)
  Bottom Layer w10: v1(8080,8070) 8050,8070 8015,8035 8015,7850 8050,7815 v1@10542.7,7815
SIM-POWER: M1.1 U1.26 | length 7270.6
  Top Layer w10: U1.26@6062.48,4955.47 6104.53,4955.47 6140,4920 v4(6140,4915) ; M1.1@10234.21,8603.05 10235,8602.26 v1(10235,8520)
  Bottom Layer w10: v4(6140,4915) 6065,4915 5990,4990 5990,5540 6025,5575 6500,5575 7795,6870 7795,8315 7905,8425 8755,8425 8835,8505 9555,8505 9610,8560 10195,8560 v1(10235,8520)
SIM-PRESENCE: M1.34 SIM1.7 | length 3459.4
  Top Layer w10: M1.34@9447.56,7814.43 9447.56,7742.44 9460,7730 v1(9510,7730) ; SIM1.7@9995,4840 10110,4840 10190,4920 v1(10190,5765)
  Bottom Layer w10: v1(9510,7730) 9510,7239 10055.31,6693.69 10190,6559 v1(10190,5765)
SIM-RESET: M1.16 U14.10 | length 1962.4
  Top Layer w10: U14.10@8189.49,7970 8875,7970 8980,8075 9290,8075 9355,8140 9355,8470 9375,8490 9620,8490 9644.41,8514.41 M1.16@9644.41,8603.05
SIM-RST: M1.33 R60.1 | length 370.9
  Top Layer w10: R60.1@9130,7725 9215,7725 9343.8,7853.8 M1.33@9447.56,7853.8
SIM-RXD: M1.10 U1.16 | length 6248.1
  Top Layer w10: v1(6100,5440) 6100,5215 6112.48,5202.52 U1.16@6132.36,5202.52 ; v1(9675,8445) 9735,8445 9795,8505 9845,8505 9880.63,8540.63 M1.10@9880.63,8603.05
  Bottom Layer w10: v1(6100,5440) 6100,5475 6130,5505 6535,5505 7865,6835 7865,8265 7950,8350 8800,8350 8895,8445 v1(9675,8445)
SIM-STATUS: M1.66 U14.4 | length 2631.9
  Top Layer w10: U14.4@8000.51,8120 8060,8120 8090,8150 v1(8090,8180) ; v1(10300,8430) 10300,8385 10318.17,8366.83 M1.66@10392.44,8366.83
  Bottom Layer w10: v1(8090,8180) 8140,8130 9320,8130 9390,8200 9915,8200 10145,8430 v1(10300,8430)
SIM-TXD: M1.9 U1.17 | length 6453
  Top Layer w10: v1(6035,5440) 6062.48,5412.52 U1.17@6062.48,5132.64 ; v1(9920,8505) M1.9@9920,8603.05
  Bottom Layer w10: v1(6035,5440) 6035,5505 6065,5535 6515,5535 7825,6845 7825,8285 7925,8385 8780,8385 8870,8475 9605,8475 9635,8505 v1(9920,8505)
SIM-VDD: C54.1 M1.30 SIM1.1 | length 3498.1
  Top Layer w10: C54.1@9130,8025 9235,8025 9288.09,7971.91 M1.30@9447.56,7971.91 9523.09,7971.91 9565,7930 9565,7373 9856,7082 9856,5184 9900,5140 SIM1.1@9995,5140
SOUND_OUT: C53.2 P7.1 T2.1 | length 14662.4
  Top Layer w16: v1(2260,3970) 2260,5185 2370,5295 3350,5295 T2.1@3480,5165 ; v1(2420,3165) 2420,3085 2475,3030 5451.1,3030 5491.1,3070 5625,3070 ; P7.1@5560,3138.9 5560,3135 5625,3070 ; v1(6825,3170) 6610,3170 6510,3070 5625,3070 ; C53.2@8057.6,5520 8110,5520 8205,5425 8680,5425 8713,5458 8713,5573 8763.12,5623.12 9351.88,5623.12 9495,5480 9495,3290 9405,3200 v1(8925,3200)
  Bottom Layer w16: v1(2260,3970) 2260,3510 2420,3350 v1(2420,3165) ; v1(6825,3170) 8895,3170 v1(8925,3200)
SS: S1.1 U1.20 | length 6659.8
  Top Layer w10: U1.20@6062.48,5073.58 6128.58,5073.58 v2(6150,5095) ; S1.1@10480,4275 v1(10770,4275)
  Bottom Layer w10: v2(6150,5095) 6150,4965 6166.81,4948.19 6239.03,4948.19 6285,4994.15 6285,5033.31 6346.81,5095.12 6346.81,5161.81 6793.19,5608.19 6794.03,5608.19 6795.85,5610 8945,5610 10035,4520 10035,4035 10075,3995 10680,3995 10770,4085 v1(10770,4275)
STM32_TO_M8: R7.1 U1.2 U15.32 | length 6392.1
  Top Layer w10: v4@6400,5125 v4(6410,5125) ; 6407.95,5147.95 U1.2@6407.95,5202.52
  Top Layer w12: U15.32@7750.24,4639.65 7880.35,4639.65 7925,4595 8100,4595 8170,4525 R7.1@8170,4440 v1(8170,4435)
  Bottom Layer w10: v4@6400,5125 v4(6410,5125) 6410,5191.5 6806.69,5588.19 8926.81,5588.19 9595,4920 9595,4390 9555,4350 9110,4350 8960,4500 8285,4500 8220,4435 v1(8170,4435)
  Bottom Layer w12: v1@8165,4430 v1(8170,4435)
STM_RELAY_BUSY: U1.4 U9.2 | length 4645.5
  Top Layer w10: U9.2@6070,7100.51 6070,6965 6115,6920 7620,6920 7715,6825 7715,5845 7635,5765 v2(7635,5470) ; U1.4@6368.58,5202.52 6368.58,5273.58 6445,5350 v1(7235,5350)
  Bottom Layer w10: v1(7235,5350) 7425,5350 7540,5465 7630,5465 v2(7635,5470)
STM_RELAY_CALL: U1.54 U9.3 | length 4937.4
  Top Layer w10: U9.3@6120,7100.51 6120,6995 6170,6945 7640,6945 7745,6840 7745,5805 v2(7685,5745) ; U1.54@6497.52,4935.79 7180.79,4935.79 7425,5180 7425,5850 v1(7450,5875)
  Bottom Layer w10: v1(7450,5875) 7580,5745 v2(7685,5745)
STM_RELAY_INTERCOM: U1.3 U9.5 | length 4637.5
  Top Layer w10: U9.5@6220,7100.51 6220,7005 6255,6970 7655,6970 7775,6850 7775,5755 7680,5660 v2(7680,5410) ; U1.3@6388.27,5202.52 6388.27,5258.27 6450,5320 7195,5320 v1(7235,5280)
  Bottom Layer w10: v1(7235,5280) 7400,5280 7530,5410 v2(7680,5410)
STM_RELAY_RECORD: U1.41 U9.4 | length 6180
  Top Layer w10: v1(4640,4120) 4705,4120 4985,4400 6090,4400 6289.84,4599.84 U1.41@6289.84,4767.48 ; v1(5590,6755) 5590,7090 5660,7160 6165,7160 6170,7155 U9.4@6170,7100.51
  Bottom Layer w10: v1(4640,4120) 4640,6035 4905,6300 5135,6300 v1(5590,6755)
TEST: SW5.1 U15.12 | length 3734.3
  Top Layer w10: U15.12@7655.75,4970.35 7655.75,5085.75 7765,5195 9005,5195 9085,5115 9085,4600 9085,3430 9072.5,3417.5 SW5.1@9072.5,3268.9 SW5.1@9332.5,3268.9
TIP: C1.2 K2.2 K5.7 P2.12 R26.2 | length 8097.2
  Top Layer w12: P2.12@2465,6025 2365,6025 2324,6066 2324,6454 2395,6525 2695,6525 2820,6650 2820,6800 2850,6830 K5.7@2927.5,6830 ; v5(4250,5950) 4250,5880 4275,5855 4870,5855 5005,5720 5005,5325 5080,5250 5445,5250 5515,5320 5515,5470 C1.2@5605,5560
  Bottom Layer w12: P2.12@2465,6025 2660,6025 2985,5700 4120,5700 4250,5830 v5(4250,5950) ; K5.7@2927.5,6830 2825,6830 2770,6885 2770,7240 2823,7293 4272,7293 4330,7235 4330,7050 4350,7030 K2.2@4472.5,7030
VS1003_DREQ: U1.59 U10.8 | length 3556.1
  Top Layer w10: U1.59@6497.52,5034.21 7174.21,5034.21 7345,5205 7345,6000 7410,6065 v1(7525,6065) ; v1(8440,6785) 8472.8,6817.8 U10.8@8565,6817.8
  Bottom Layer w10: v1(7525,6065) 7585,6065 7615,6095 7971.69,6095 8018.07,6141.38 8231.38,6141.38 8345,6255 8345,6740 8390,6785 v1(8440,6785)
VS1003_XCS: U1.62 U10.23 | length 3475.8
  Top Layer w10: U1.62@6497.52,5093.27 7168.27,5093.27 7295,5220 7295,6050 7440,6195 v1(7525,6195) ; U10.23@8316.97,6947.72 8316.97,6898.03 8330,6885 v1(8330,6845)
  Bottom Layer w10: v1(7525,6195) 8215,6195 8295,6275 8295,6810 v1(8330,6845) v1@8340,6845
VS1003_XDCS: U1.61 U10.13 | length 3600
  Top Layer w10: U1.61@6497.52,5073.58 7178.58,5073.58 7320,5215 7320,6035 7415,6130 v1(7525,6130) ; v1(8395,6845) 8405,6855 8475,6855 8513.82,6893.82 U10.13@8513.82,6947.72
  Bottom Layer w10: v1(7525,6130) 7975.85,6130 8009.03,6163.19 8217.63,6163.19 8320,6265.56 8320,6770 v1(8395,6845)
VS1003_XRESET: U1.58 U10.3 | length 3506.6
  Top Layer w10: U1.58@6497.52,5014.53 7189.53,5014.53 7370,5195 7370,5960 7415,6005 7525,6005 v1(7525,6000) ; v1(8475,6730) 8485.63,6719.37 U10.3@8565,6719.37
  Bottom Layer w10: v1(7525,6000) 7567.5,6000 7627.5,6060 7967.54,6060 8027.1,6119.57 8244.57,6119.57 8370,6245 8370,6680 8410,6720 8465,6720 v1(8475,6730) v1@8465,6740
pads on no net: CN1.2 CN1.4 CN1.6 CN1.9 J-LINK.17 K1.4 K1.5 K1.6 K1.7 K2.5 K2.6 K3.2 K3.3 K3.4 K3.5 K3.6 K4.2 K4.3 K4.4 K4.5 K4.6 K5.5 K5.6 M1.2 M1.3 M1.4 M1.5 M1.6 M1.7 M1.8 M1.11 M1.12 M1.13 M1.14 M1.15 M1.19 M1.20 M1.21 M1.22 M1.23 M1.24 M1.25 M1.26 M1.35 M1.36 M1.37 M1.38 M1.40 M1.41 M1.42 M1.43 M1.44 M1.47 M1.48 M1.49 M1.50 M1.51 M1.67 M1.68 P1.1 P1.2 P1.3 P1.4 P1.11 P1.12 P2.5 P3.2 P3.5 P3.6 P3.7 P3.8 P3.9 P3.10 P3.11 S1. S1.8 S1.9 S1.10 SIM1. SIM1.4 SIM1.9 SIM1.10 T1. T2. U1.1 U2.6 U3.6 U4.4 U5.4 U6.4 U8.11 U8.12 U8.13 U8.14 U9.6 U9.7 U9.10 U9.11 U10.9 U10.10 U10.11 U10.12 U10.15 U10.25 U10.27 U10.33 U10.34 U10.35 U10.36 U13.11 U13.12 U13.13 U13.14 U14.1 U14.2 U14.3 U14.6 U14.11 U14.14 U14.15 U14.16 U15.13 U15.19 U15.20 U15.22
copper on no net: | length 535
  Top Layer w10: 10320.15,8150 ccw(c10235,8150) 10320.15,8150
  other v1: 4045,4795
  other v2: 2160,3060 10890,3060 2065,3155 10790,3155 2255,3160 10985,3160 2160,3255 10890,3260 2160,8640 10890,8640 2255,8740 10795,8740 10990,8740 2060,8745 2160,8835 10885,8835
  other v6: 7885,6005

## Polygon pours and split planes (outlines as drawn)
GND on Top Layer "TOP-No Net" (solid, pour order 4): 2005,8900 11050,8900 11050,3005 2005,3005
GND on Bottom Layer "TOP-No Net" (solid, pour order 6): 2005,8900 11050,8900 11050,3005 2005,3005

## Keep-outs
Keep-Out Layer:
  lines w11.81: 2005,3005 11050,3005 11050,8900 2005,8900 2005,3005

## Other copper
Top Layer:
  rectangle: 9785,8180 10040,8435
  text "VERSION  3" at 7670,8725 h180

## Silkscreen, mask and mechanical layers (free items; w line width, h text height)
Top Overlay:
  text "12V" at 2575,8195 h78.74
  text "GND 12V" at 2575,7985 h78.74
  text "24V" at 2575,7790 h78.74
  text "GND 24V" at 2575,7595 h78.74
  text "PLC TX" at 2575,7195 h78.74
  text "PLC RX" at 2575,6995 h78.74
  text "GND" at 2575,6795 h78.74
  text "PHONE" at 2575,6590 h78.74
  text "INTERCOM" at 2976,6479.98 h50
  text "RECORD" at 3401,6479.98 h50
  text "CALL" at 3856,6480 h50
  text "BUSY" at 4268,6480.07 h50
  text "POWER" at 4661,6479.98 h50
  text "PHONE" at 2575,6395 h78.74
  text "RING" at 2575,6195 h78.74
  text "TIP" at 2570,5995 h78.74
  text "GSM ANTEN" at 10650,5940 h55.12
  text "SIM CARD" at 9960,5405 h59.06
  text "OUT 1" at 2570,4975 h78.74
  text "OUT 2" at 2570,4775 h78.74
  text "INPUT 1" at 2570,4565 h78.74
  text "MICRO SD" at 10545,4530 h59.06
  text "INPUT 2" at 2570,4375 h78.74
  text "INPUT 3" at 2570,4165 h78.74
  text "Azaransystem Technology" at 6997,4102 h177.17
  text "www.azaransystem.com" at 7008,3979 h98.43
  text "INPUT 4" at 2570,3970 h78.74
  text "RS232" at 10550,3555 h59.06 r90
  text "J-LINK" at 3050,3430.82 h78.74
  text "ISP" at 4445,3430 h78.74
  text "BOOT0" at 7160,3374.85 h78.74
  text "RESET" at 7810,3375 h78.74
  text "TEST" at 9095,3375 h78.74
  text "POWER" at 9700,3374.85 h78.74
  text "LEARN" at 8430,3374.03 h78.74
  text "SOUND" at 5480,3320 h78.74
  text "GSM UPDATE" at 5930,3320 h78.74